# Altium PCB BLE LED controller.PcbDoc
Units mm, origin at the board's own origin, x right, y up, seen from the top; angles counter-clockwise.
Board outline 152.4 x 101.6 mm, 2 copper layers (Top Layer, Bottom Layer); 2 components, 23 nets, 46 pads, 0 vias.
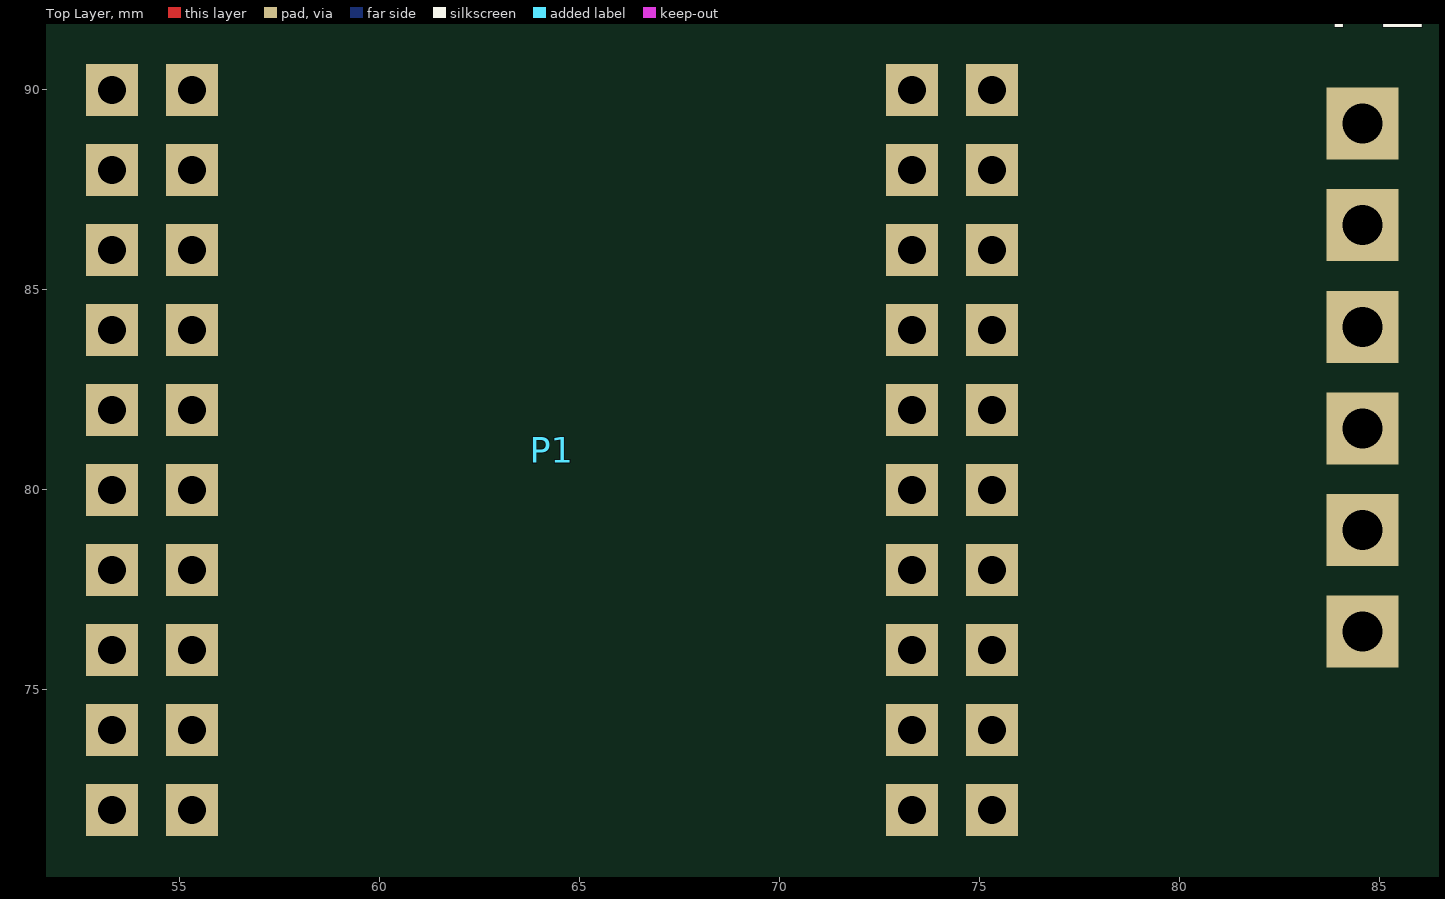
[diagram p0: Top Layer view]
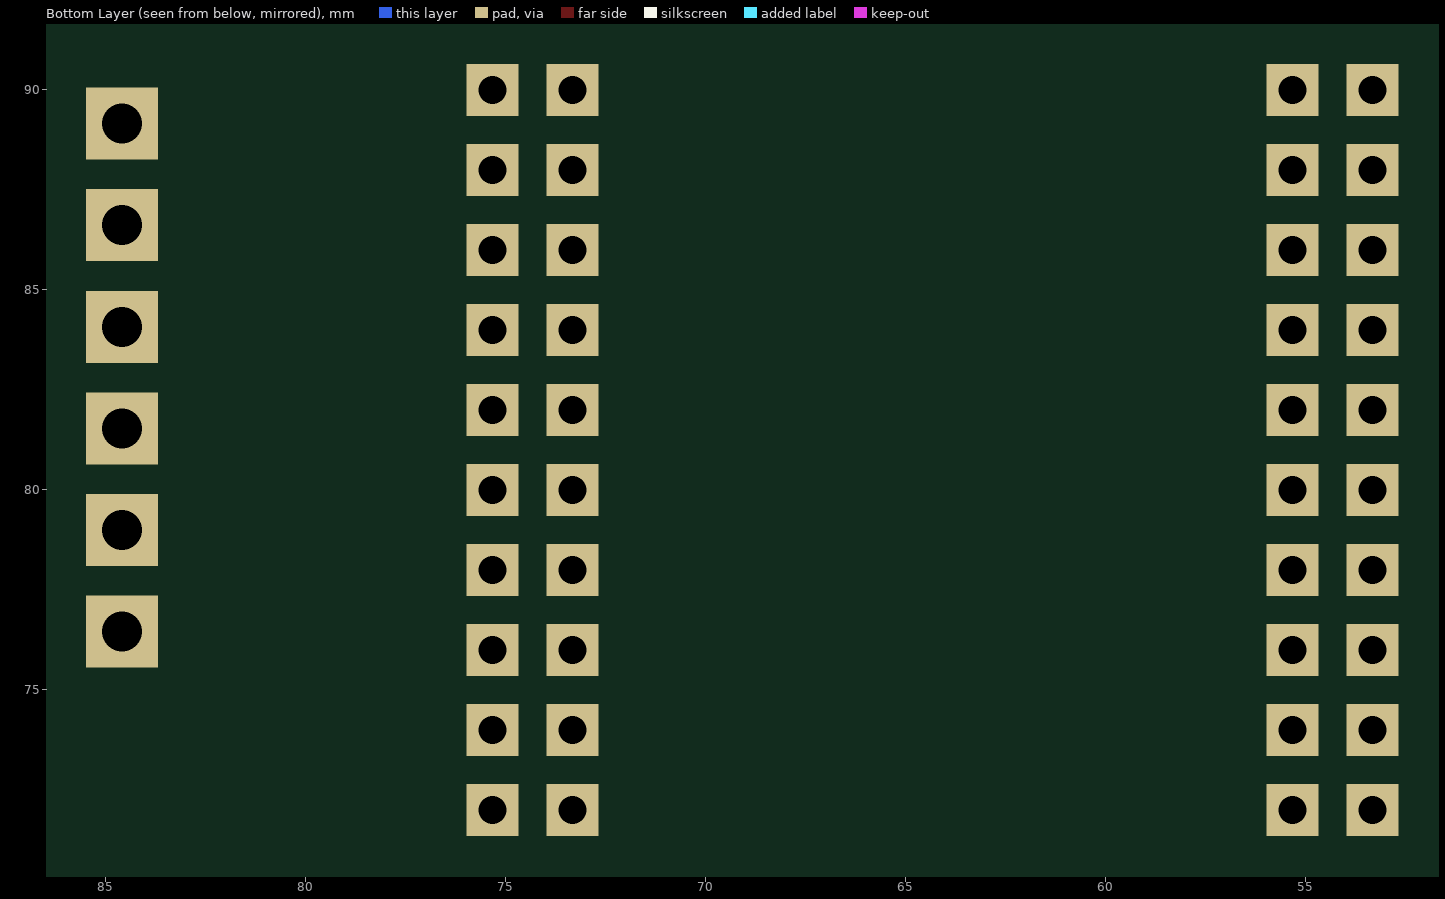
[diagram p1: Bottom Layer view, seen from below]

## Layer stack, top to bottom
Top Solder: solder mask 0.0102, Solder Resist, Dk 3.5
Top Layer: signal copper 0.0356
Dielectric 1: dielectric 0.32, FR-4, Dk 4.8
Bottom Layer: signal copper 0.0356
Bottom Solder: solder mask 0.0102, Solder Resist, Dk 3.5

## Board outline
25.4,25.4 177.8,25.4 177.8,127 25.4,127

## Design rules (kind name [scope] priority, off if disabled: settings)
Clearance [All] p1: gap=0.254
PolygonConnect [All] p1: connectstyle=Relief reliefconductorwidth=0.254 reliefentries=4 polygonreliefangle="90 Angle" airgapwidth=0.254
RoomDefinition Top [InComponentClass('Top')] p1: confinementstyle=ConfineIn formatcopy=TRUE lockcomponents=FALSE outline 137.414,42.291 140.843,42.291 140.843,59.817 137.414,59.817
RoomDefinition LDO [InComponentClass('LDO')] p2: confinementstyle=ConfineIn formatcopy=TRUE lockcomponents=FALSE outline 0,0 50.8,0 50.8,25.4 0,25.4
RoomDefinition FETs [InComponentClass('FETs')] p3: confinementstyle=ConfineIn formatcopy=TRUE lockcomponents=FALSE outline 0,0 50.8,0 50.8,25.4 0,25.4
RoutingVias [All] p1: holewidth=0.711 width=1.27 viastyle="Through Hole" minholewidth=0.711 minwidth=1.27 maxholewidth=0.711 maxwidth=1.27
SolderMaskExpansion [All] p1: expansion=0.102
Width [All] p1: maxlimit=0.254 minlimit=0.254 preferedwidth=0.254
30 further rules are at their usual default settings.

## Components (designator, comment, footprint, x,y, rotation, side; value= is the part's Value field where it differs from the comment)
P1 "Core51822" Core51822 52.324,70.993 r0 top
P2 "SWD+UART" "Header 5x1 2.54mm" 84.582,81.534 r90 top

## Footprints (in the part's own frame and the unit in brackets; to place one, negate y for a bottom-side part, rotate by r counter-clockwise, add the part's x,y. Pads: shape width x height; smd on the part's side, far side on the other; paste and mask are expansions set on the pad)
Core51822 [mm]
  rect 1.3x1.3 hole 0.7: 1(1,19) 2(3,19) 3(1,17) 4(3,17) 5(1,15) 6(3,15) 7(1,13) 8(3,13) 9(1,11) 10(3,11) 11(1,9) 12(3,9) 13(1,7) 14(3,7) 15(1,5) 16(3,5) 17(1,3) 18(3,3) 19(1,1) 20(3,1) 21(21,19) 22(23,19) 23(21,17) 24(23,17) 25(21,15) 26(23,15) 27(21,13) 28(23,13) 29(21,11) 30(23,11) 31(21,9) 32(23,9) 33(21,7) 34(23,7) 35(21,5) 36(23,5) 37(21,3) 38(23,3) 39(21,1) 40(23,1)
"Header 5x1 2.54mm" [mm]
  rect 1.8x1.8 hole 1: 1(-5.08,0) 2(-2.54,0) 3(0,0) 4(2.54,0) 5(5.08,0) 6(7.62,0)

## Nets (pads, with @x,y where several pads share a name; then routed paths per layer and width w, separated by ;. In a path a pad name is that pad's centre, name@x,y a point inside that pad or via, vN(x,y) a via of type N, cw(c..) or ccw(c..) an arc to the next point about the centre after c; other vN are vias at no path point)
3.3V: P2.1
12V: 
GND: P2.6
NetAMS1117_1: 
NetAMS1117_2: 
NetAMS1117_3: 
NetC1_1: 
NetLED_IC1_5: 
NetLED_IC1_7: 
NetLED_IC2_5: 
NetLED_IC2_7: 
NetLED_IC3_5: 
NetLED_IC3_7: 
P0.02: 
P0.03: 
P0.04: 
P0.05: 
P0.06: 
P0.07: 
P0.15: P2.5
P0.16: P2.4
SWDCLK: P2.2
SWDIO: P2.3
pads on no net: P1.1 P1.2 P1.3 P1.4 P1.5 P1.6 P1.7 P1.8 P1.9 P1.10 P1.11 P1.12 P1.13 P1.14 P1.15 P1.16 P1.17 P1.18 P1.19 P1.20 P1.21 P1.22 P1.23 P1.24 P1.25 P1.26 P1.27 P1.28 P1.29 P1.30 P1.31 P1.32 P1.33 P1.34 P1.35 P1.36 P1.37 P1.38 P1.39 P1.40